# Altium PCB PCB1.PcbDoc (part 1 of 2)
Units mm, origin at the board's own origin, x right, y up, seen from the top; angles counter-clockwise.
Board outline 71.37 x 73.91 mm, 2 copper layers (Top Layer, Bottom Layer); 19 components, 50 nets, 188 pads, 78 vias.
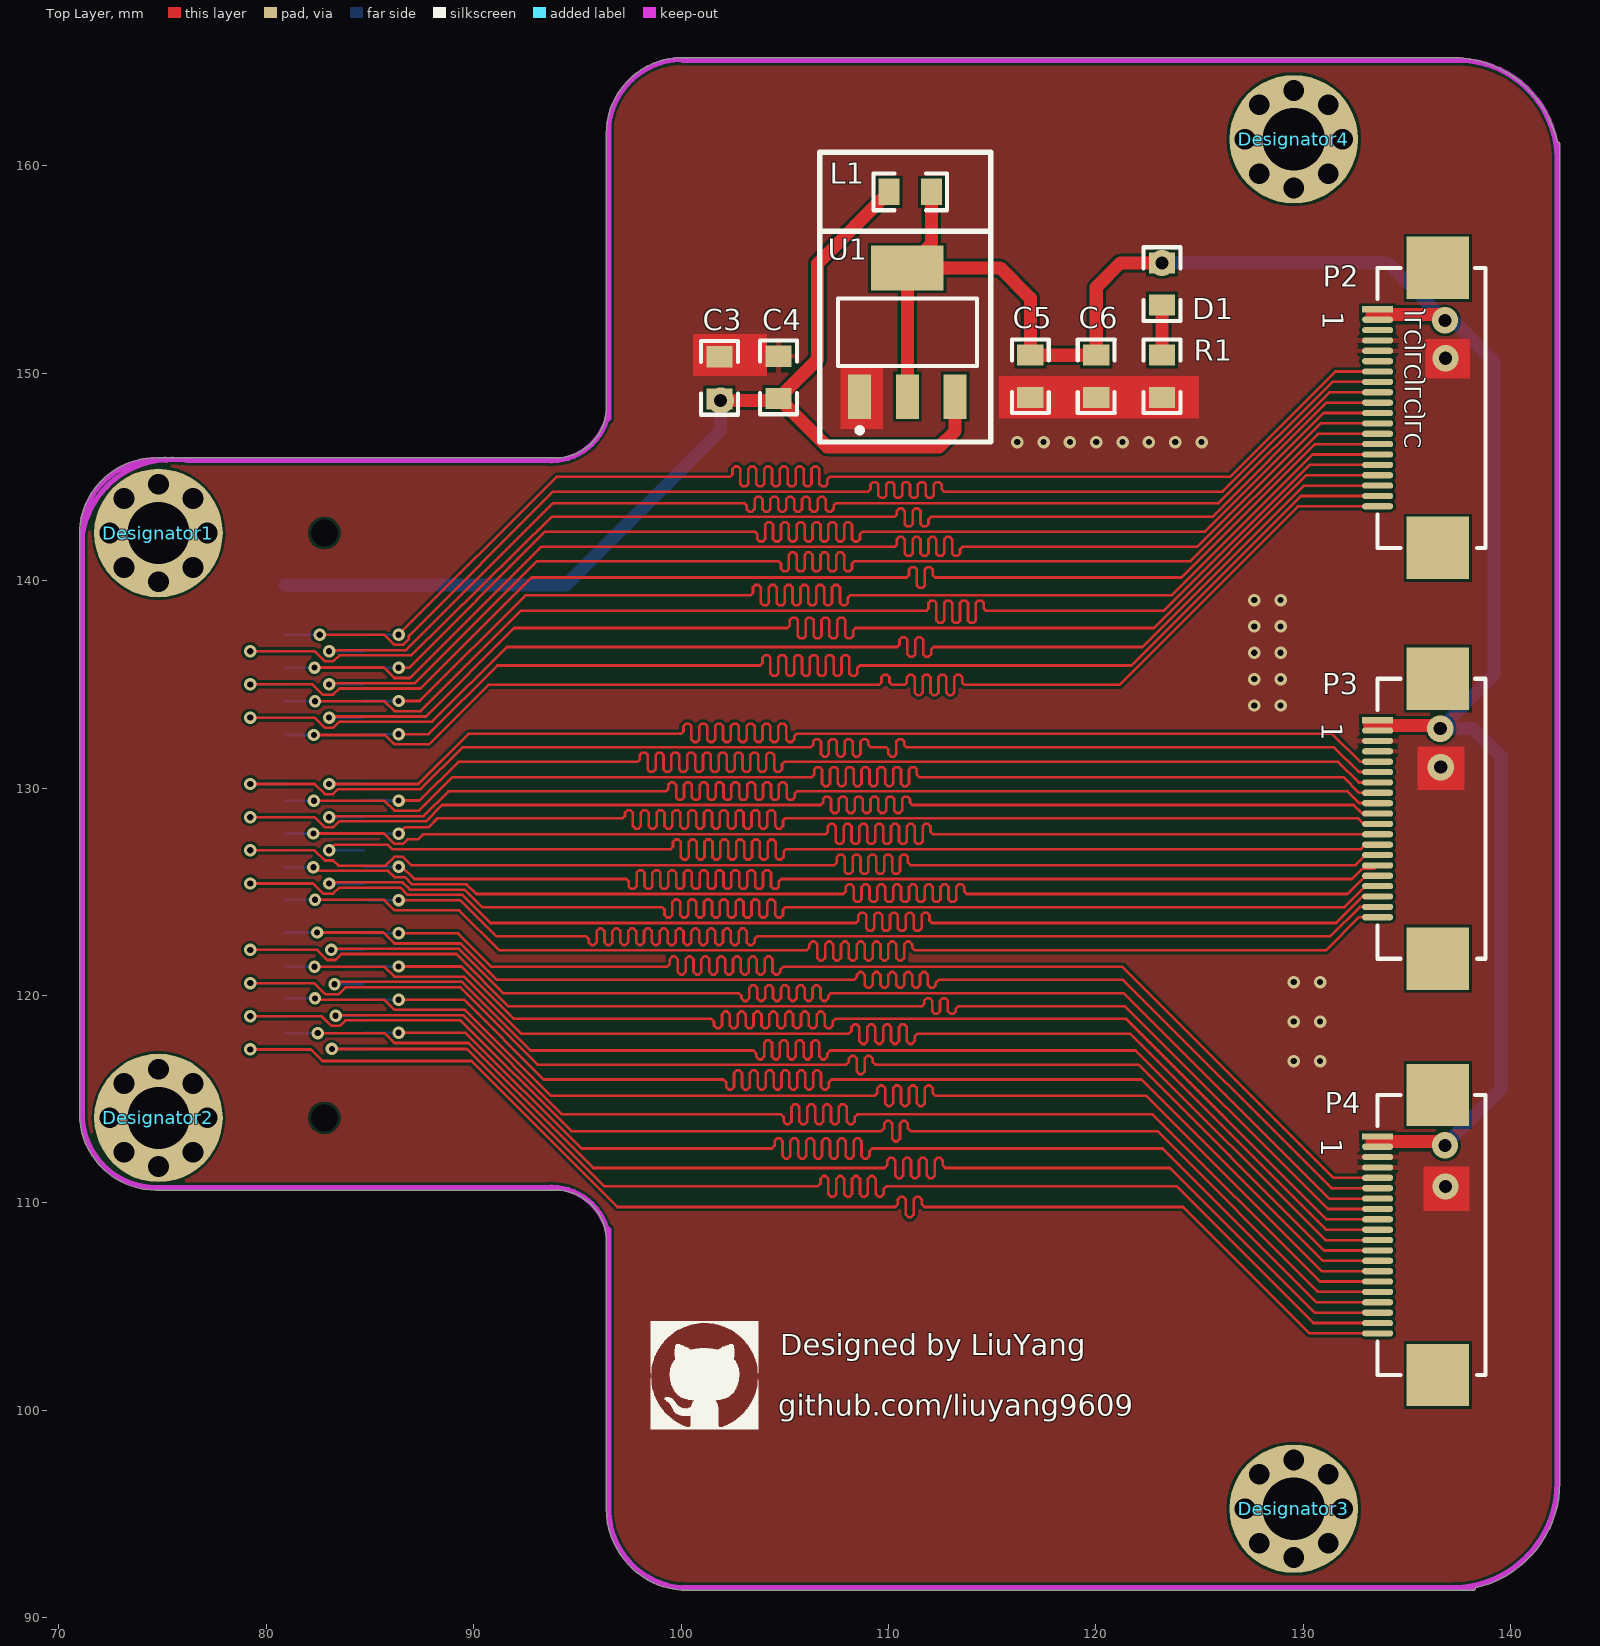
[diagram p0: Top Layer view]
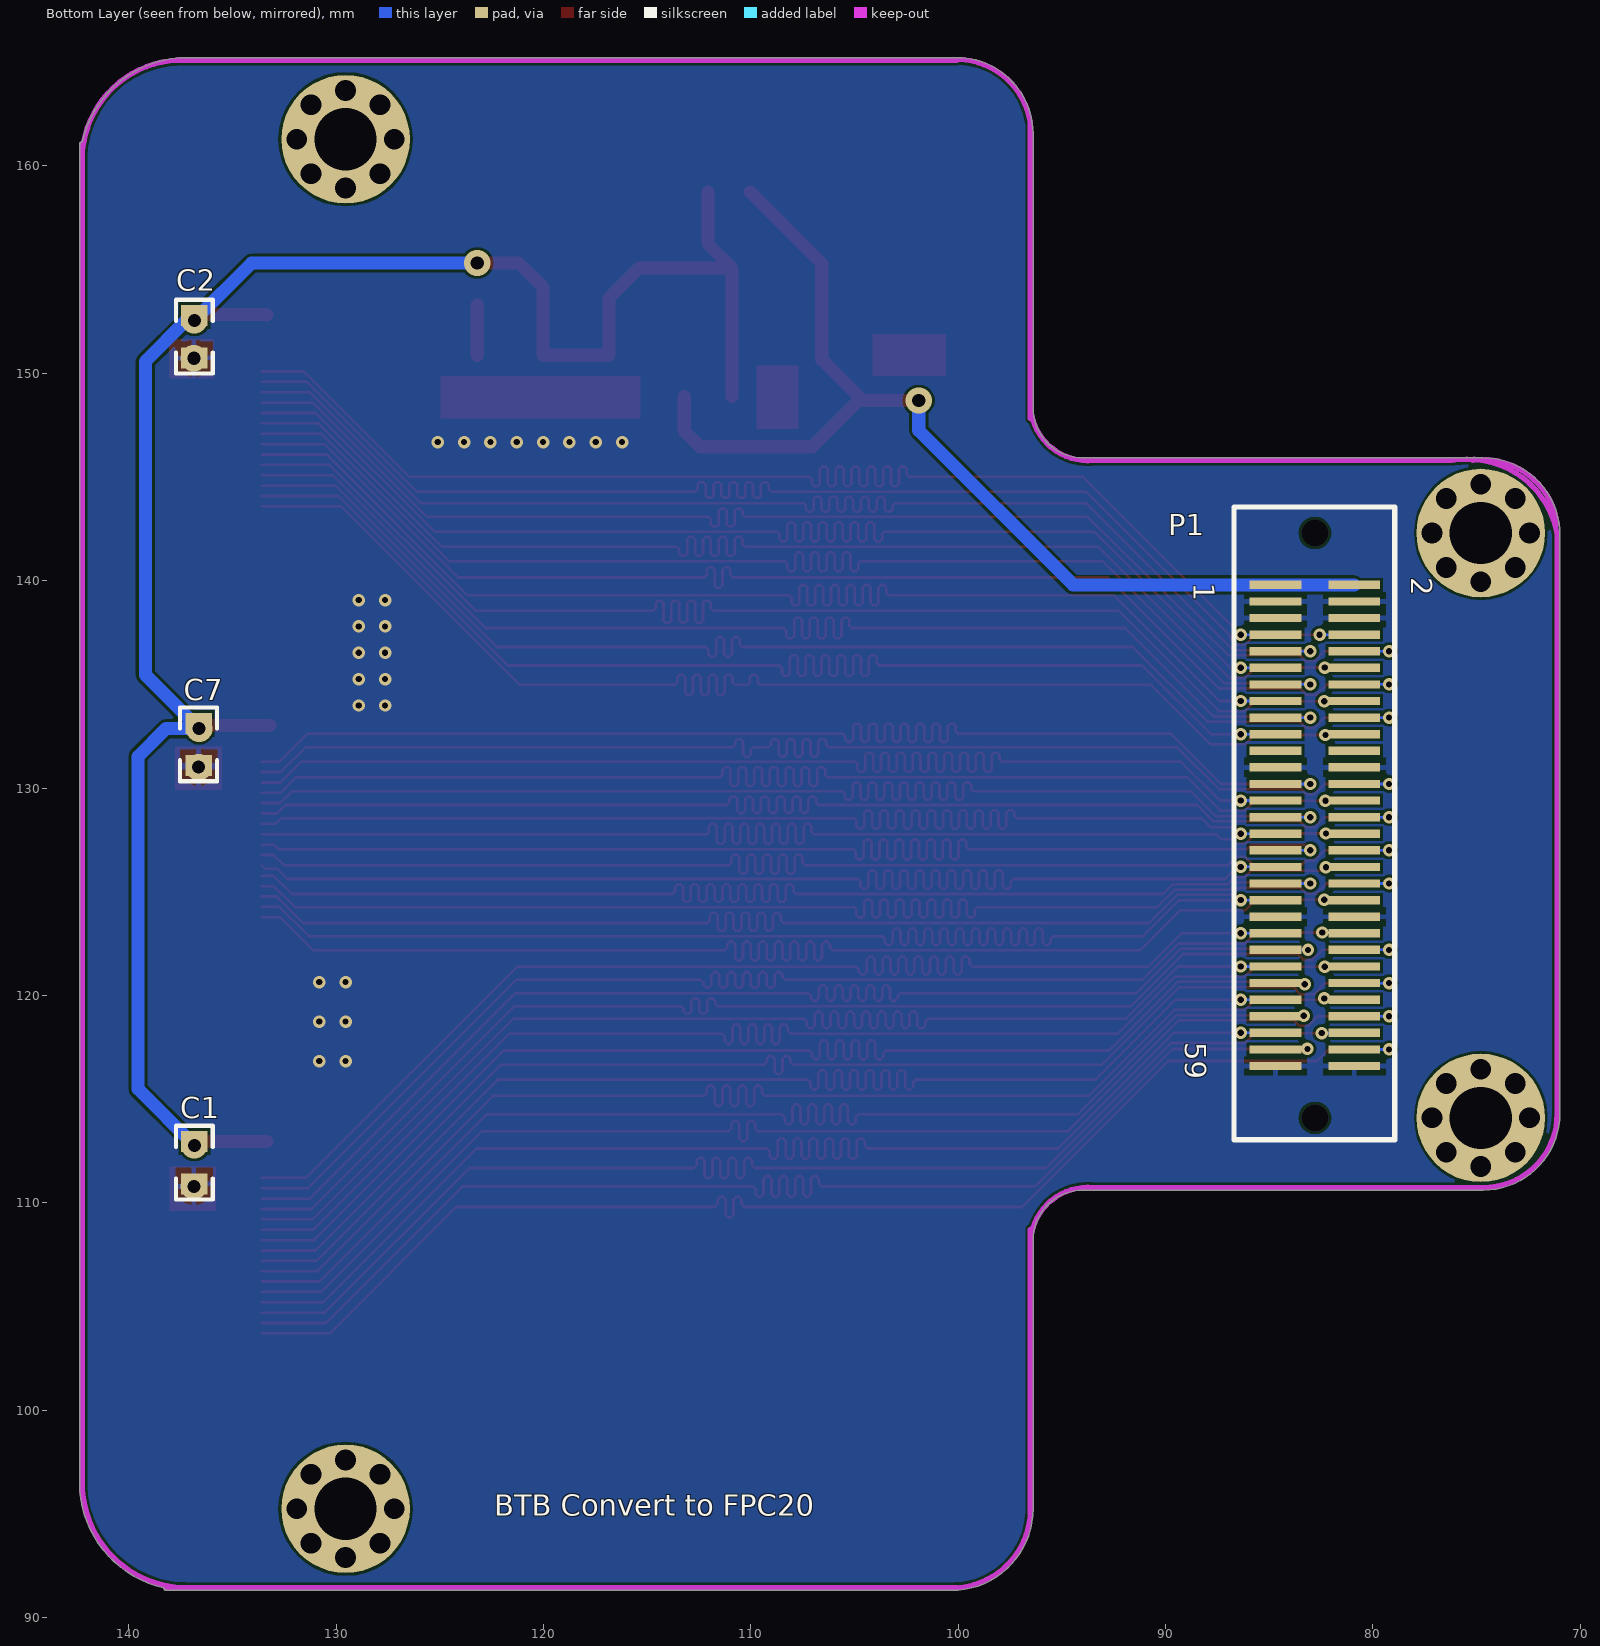
[diagram p1: Bottom Layer view, seen from below]
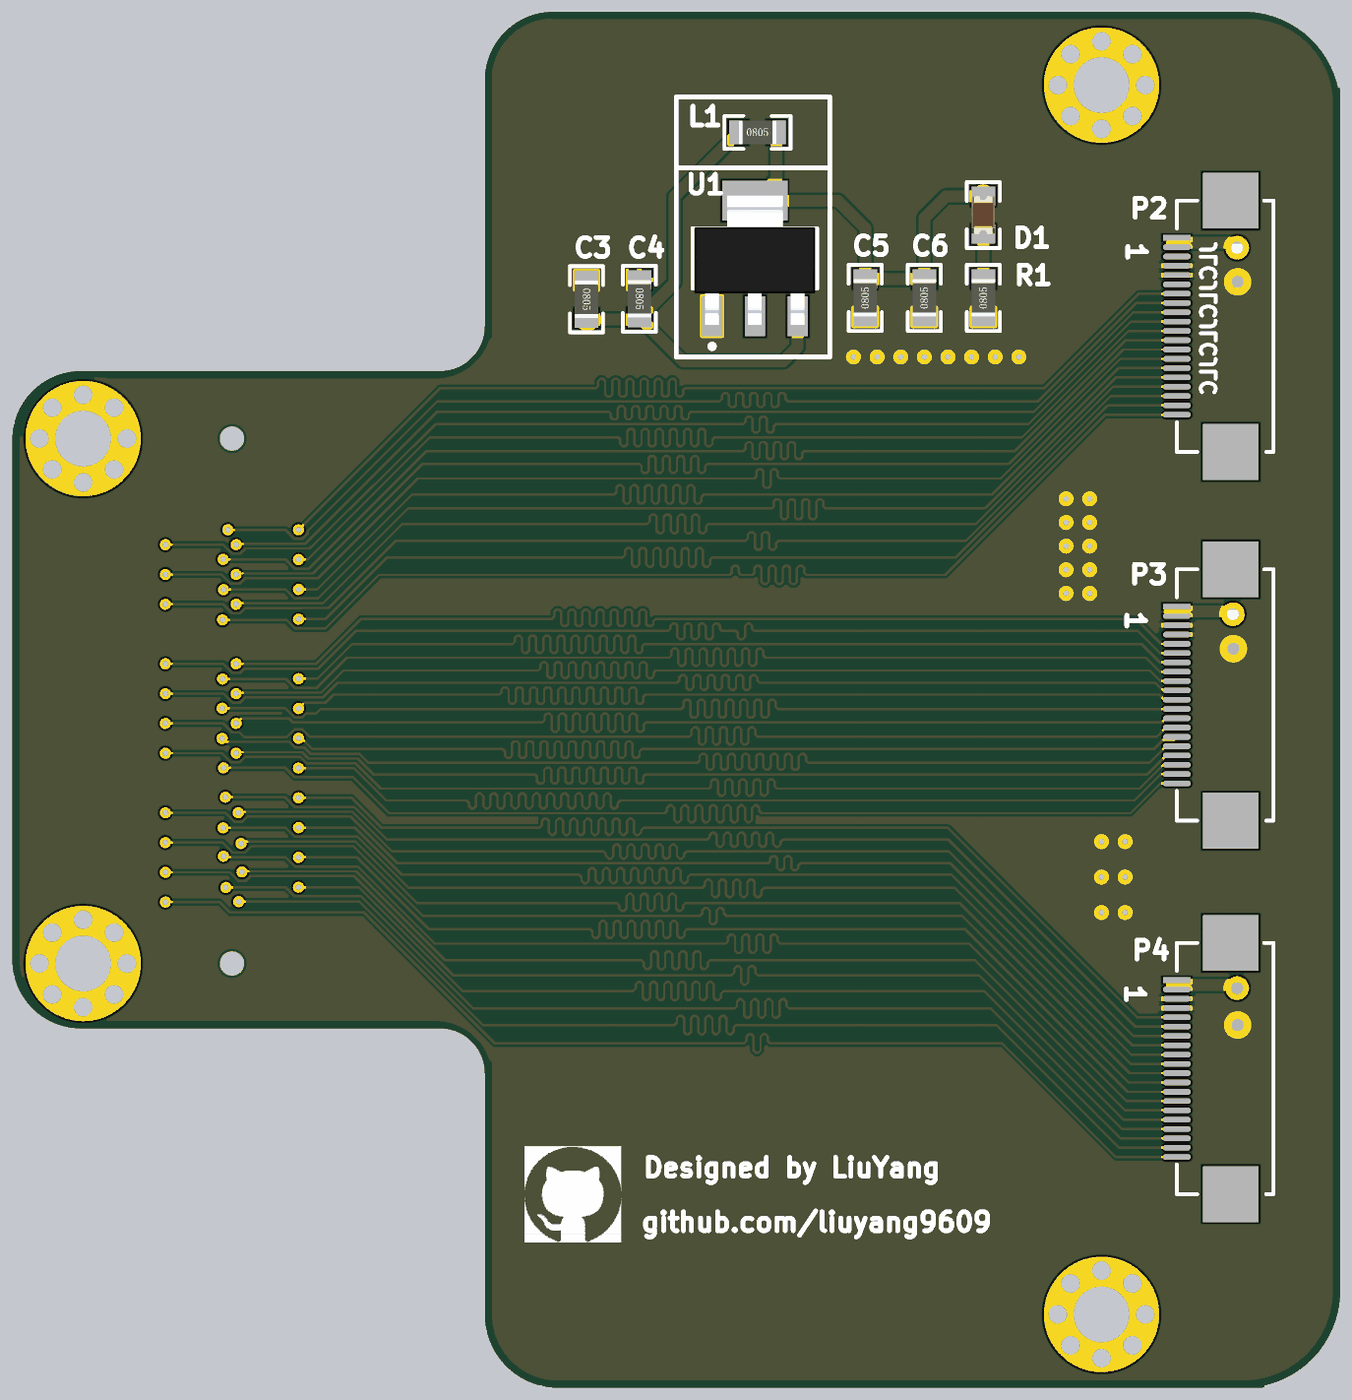
[diagram p3: 3D render of the assembled board from above, using the file's embedded part models]
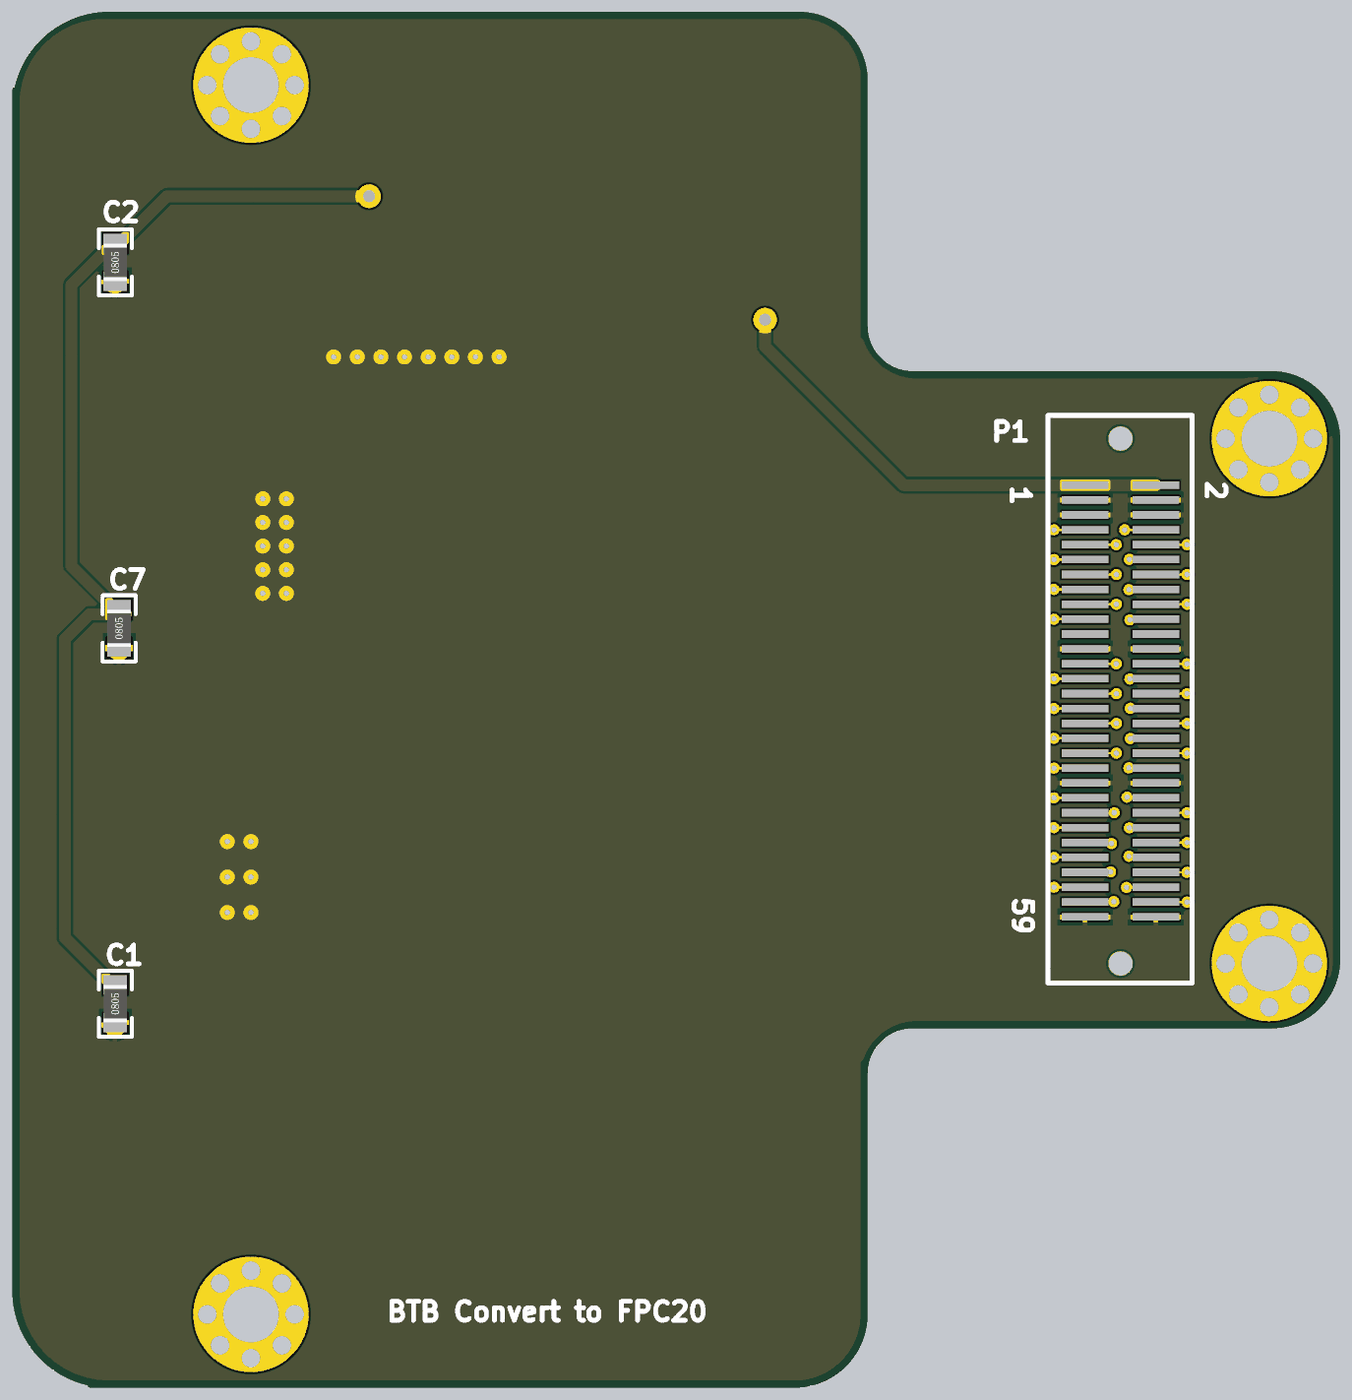
[diagram p4: 3D render of the assembled board from below, using the file's embedded part models]

## Layer stack, top to bottom
Top Solder: solder mask 0.0102, Solder Resist, Dk 3.5
Top Layer: signal copper 0.0356
Dielectric 1: dielectric 0.32, FR-4, Dk 4.8
Bottom Layer: signal copper 0.0356
Bottom Solder: solder mask 0.0102, Solder Resist, Dk 3.5

## Board outline
70.993,114.3 cw(c71.12,114.3) 70.993,114.301 70.993,114.3 ccw(c74.676,114.3) 74.676,110.617 93.98,110.617 cw(c93.98,108.204) 96.393,108.204 96.393,95.25 ccw(c100.33,95.25) 100.33,91.313 138.176,91.313 ccw(c138.176,91.44) 138.303,91.44 ccw(c137.16,96.52) 142.367,96.52 142.367,161.036 ccw(c142.24,161.036) 142.24,161.163 ccw(c137.16,160.02) 137.161,165.227 ccw(c137.16,165.1) 137.16,165.227 100.076,165.227 ccw(c100.076,161.544) 96.393,161.544 ccw(c96.52,161.544) 96.393,161.543 96.393,148.336 cw(c93.98,148.336) 93.98,145.923 74.676,145.923 ccw(c74.676,142.24) 70.993,142.24 ccw(c71.12,142.24) 70.993,142.239

## Design rules (kind name [scope] priority, off if disabled: settings)
Clearance [All] p1: gap=0.127
Length FPC3Length [InNetClass('FPC3')] p1: maxlimit=65 minlimit=64
Length FPC2 [InNetClass('FPC2')] p2: maxlimit=65 minlimit=64
Length FPC1_Length [InNetClass('FPC1')] p3: maxlimit=65 minlimit=64
PolygonConnect [All] p1: connectstyle=Relief reliefconductorwidth=0.254 reliefentries=4 polygonreliefangle="90 Angle" airgapwidth=0.254
RoutingVias [All] p1: holewidth=0.3 width=0.6 viastyle="Through Hole" minholewidth=0.3 minwidth=0.6 maxholewidth=100 maxwidth=100
SolderMaskExpansion [All] p1: expansion=0.102
Width [All] p1: maxlimit=1.27 minlimit=0.127 preferedwidth=0.127
30 further rules are at their usual default settings.

## Classes and differential pairs
net class FPC3: P14 R14 T10 T11 T12 T14 T15 U12 U14 U15 V12 W13 W14 Y14 Y16 Y17
net class FPC2: N18 P15 P16 P19 R16 R17 T16 U17 U18 U19 V15 V16 V17 V18 W15 W16
net class FPC1: N17 N20 P18 P20 R18 T17 T20 U20 V20 W18 W19 W20 Y18 Y19
component class Sheet1: C1 C2 C3 C4 C5 C6 C7 D1 L1 P1 P2 P3 P4 R1 U1

## Components (designator, comment, footprint, x,y, rotation, side; value= is the part's Value field where it differs from the comment)
C1 "Cap" R0805 136.83,111.938 r90 bottom
C2 "Cap" R0805 136.83,151.765 r90 bottom
C3 "Cap" R0805 101.854,149.784 r270 top
C4 "Cap" R0805 104.699,149.809 r270 top
C5 "Cap" R0805 116.84,149.86 r90 top
C6 "Cap" R0805 120.015,149.86 r90 top
C7 "Cap" R0805 136.627,132.105 r90 bottom
D1 "LED" LED0805红 123.19,154.305 r270 top
Designator1 "Comment" 定位孔 74.8,142.3 r0 top
Designator2 "Comment" 定位孔 74.8,114.1 r0 top
Designator3 "Comment" 定位孔 129.54,95.25 r0 top
Designator4 "Comment" 定位孔 129.54,161.29 r0 top
L1 "Inductor" R0805 111.049,158.75 r0 top
P1 "BTB 30X2" BTBCON_0.8mm_60P 84.7,139.8 r180 bottom
P2 "FPC20P" FPC20Pin 133.586,153.086 r0 top
P3 "FPC20P" FPC20Pin 133.586,133.274 r0 top
P4 "FPC20P" FPC20Pin 133.586,113.208 r0 top
R1 "Res1" R0805 123.19,149.86 r90 top
U1 "AMS1117" "SOT-223   AMS1117" 110.908,151.981 r0 top

## Footprints (in the part's own frame and the unit in brackets; to place one, negate y for a bottom-side part, rotate by r counter-clockwise, add the part's x,y. Pads: shape width x height; smd on the part's side, far side on the other; paste and mask are expansions set on the pad)
BTBCON_0.8mm_60P [mm]
  rect 2.5x0.4 smd: 1(0,0) 2(3.8,0) 3(0,-0.8) 4(3.8,-0.8) 5(0,-1.6) 6(3.8,-1.6) 7(0,-2.4) 8(3.8,-2.4) 9(0,-3.2) 10(3.8,-3.2) 11(0,-4) 12(3.8,-4) 13(0,-4.8) 14(3.8,-4.8) 15(0,-5.6) 16(3.8,-5.6) 17(0,-6.4) 18(3.8,-6.4) 19(0,-7.2) 20(3.8,-7.2) 21(0,-8) 22(3.8,-8) 23(0,-8.8) 24(3.8,-8.8) 25(0,-9.6) 26(3.8,-9.6) 27(0,-10.4) 28(3.8,-10.4) 29(0,-11.2) 30(3.8,-11.2) 31(0,-12) 32(3.8,-12) 33(0,-12.8) 34(3.8,-12.8) 35(0,-13.6) 36(3.8,-13.6) 37(0,-14.4) 38(3.8,-14.4) 39(0,-15.2) 40(3.8,-15.2) 41(0,-16) 42(3.8,-16) 43(0,-16.8) 44(3.8,-16.8) 45(0,-17.6) 46(3.8,-17.6) 47(0,-18.4) 48(3.8,-18.4) 49(0,-19.2) 50(3.8,-19.2) 51(0,-20) 52(3.8,-20) 53(0,-20.8) 54(3.8,-20.8) 55(0,-21.6) 56(3.8,-21.6) 57(0,-22.4) 58(3.8,-22.4) 59(0,-23.2) 60(3.8,-23.2)
  round 1 hole 1.3: 61(1.9,2.5) 62(1.9,-25.7)
  silkscreen extent -2,-26.75 5.75,3.75
FPC20Pin [mm]
  rect 1.5x0.3 smd: 1(0,0)
  oval 1.5x0.3 smd: 2(0,-0.5) 3(0,-1) 4(0,-1.5) 5(0,-2) 6(0,-2.5) 7(0,-3) 8(0,-3.5) 9(0,-4) 10(0,-4.5) 11(0,-5) 12(0,-5.5) 13(0,-6) 14(0,-6.5) 15(0,-7) 16(0,-7.5) 17(0,-8) 18(0,-8.5) 19(0,-9) 20(0,-9.5)
  rect 3x3 smd: 21(2.9,2) 22(2.9,-11.5)
  silkscreen extent 0,-11.5 5.2,2
LED0805红 [mil]
  rect 40x50 smd: 1(-40,0) 2(40,0)
  silkscreen extent -70,-35 70,35, body extent -40,-25 40,24, height 43
R0805 [mil]
  rect 40x50 smd: 1(-40,0) 2(40,0)
  silkscreen extent -70,-35 70,35, body extent -39,-25 39,25, height 22
"SOT-223   AMS1117" [mm] "SOT-223/SC-73; 4 Leads; Body 6.7 x 7.3 mm, inc. leads (LxW max)"
  rect 1.1x2.15 smd: 1(-2.3,-3.1) 2(0,-3.1) 3(2.3,-3.1)
  rect 3.5x2.15 smd: 4(0,3.1)
  silkscreen extent -3.35,-4.85 3.35,1.63, body extent -3.25,-3.58 3.25,3.38, height 1.65
定位孔 [mm]
  round 1 hole 1: 1(-2.35,0) 1(-1.662,-1.662) 1(-1.662,1.662) 1(0,-2.35) 1(0,2.35) 1(1.662,-1.662) 1(1.662,1.662) 1(2.35,0)
  round 6.2 hole 3: 1(0,0)

## Part data
C1 C2 C3 C4 C5 C6 C7: "Capacitor"
D1: library part LED0, "Typical INFRARED GaAs LED"
P1: library part "Header 30X2", "Header, 30-Pin, Dual row"
P2 P3 P4: library part "Header 22", "Header, 22-Pin"
R1: "Resistor"

## Via types
v1: diameter 0.6, hole 0.3, Top Layer to Bottom Layer, 70 vias
v2: diameter 1.27, hole 0.635, Top Layer to Bottom Layer, 8 vias

## Nets (pads, with @x,y where several pads share a name; then routed paths per layer and width w, separated by ;. In a path a pad name is that pad's centre, name@x,y a point inside that pad or via, vN(x,y) a via of type N, cw(c..) or ccw(c..) an arc to the next point about the centre after c; other vN are vias at no path point)
DGND: C1.1 C2.1 C3.1 C4.1 C5.1 C6.1 C7.1 P1.3 P1.4 P1.5 P1.6 P1.23 P1.24 P1.41 P1.42 P1.59 P1.60 P2.4 P2.5 P3.3 P3.4 P4.3 P4.4 R1.1 U1.1
  other v1: 129.54,116.84 130.81,116.84 129.54,118.745 130.81,118.745 129.54,120.65 130.81,120.65 127.635,133.985 128.905,133.985 127.635,135.255 128.905,135.255 127.635,136.525 128.905,136.525 127.635,137.795 128.905,137.795 127.635,139.065 128.905,139.065 116.205,146.685 117.475,146.685 118.745,146.685 120.015,146.685 121.285,146.685 122.555,146.685 123.825,146.685 125.095,146.685
  other v2: 136.855,110.795 136.627,131.013 136.855,150.724
N17: P1.15 P2.15 | length 63.9
  Top Layer w0.127: v1(86.377,134.2) 87.391,134.2 92.485,139.294 100.889,139.294 103.353,139.294 103.467,139.408 103.467,139.679 103.581,139.794 103.734,139.794 103.848,139.679 103.848,139.294 103.848,138.925 103.962,138.811 104.115,138.811 104.229,138.925 104.229,139.294 104.229,139.679 104.343,139.794 104.496,139.794 104.61,139.679 104.61,139.294 104.61,138.925 104.724,138.811 104.877,138.811 104.991,138.925 104.991,139.294 104.991,139.679 105.105,139.794 105.258,139.794 105.372,139.679 105.372,139.294 105.372,138.925 105.486,138.811 105.639,138.811 105.753,138.925 105.753,139.294 105.753,139.679 105.867,139.794 106.02,139.794 106.134,139.679 106.134,139.294 106.134,138.925 106.248,138.811 106.401,138.811 106.515,138.925 106.515,139.294 106.515,139.679 106.629,139.794 106.782,139.794 106.896,139.679 106.896,139.294 106.896,138.925 107.01,138.811 107.163,138.811 107.277,138.925 107.277,139.294 107.277,139.679 107.391,139.794 107.544,139.794 107.658,139.679 107.658,139.294 107.658,138.925 107.772,138.811 107.925,138.811 108.039,138.925 108.039,139.179 108.153,139.294 108.229,139.294 123.655,139.294 130.447,146.086 P2.15@133.586,146.086
  Bottom Layer w0.127: P1.15@84.7,134.2 v1(86.377,134.2)
N18: P1.29 P3.9 | length 64.1
  Top Layer w0.127: v1(83.023,128.6) 83.074,128.651 87.586,128.651 88.78,129.845 94.818,129.845 99.263,129.845 99.377,129.959 99.377,130.162 99.492,130.277 99.644,130.277 99.758,130.162 99.758,129.845 99.758,129.553 99.873,129.438 100.025,129.438 100.139,129.553 100.139,129.845 100.139,130.162 100.254,130.277 100.406,130.277 100.52,130.162 100.52,129.845 100.52,129.553 100.635,129.438 100.787,129.438 100.901,129.553 100.901,129.845 100.901,130.162 101.016,130.277 101.168,130.277 101.282,130.162 101.282,129.845 101.282,129.553 101.397,129.438 101.549,129.438 101.663,129.553 101.663,129.845 101.663,130.162 101.778,130.277 101.93,130.277 102.044,130.162 102.044,129.845 102.044,129.553 102.159,129.438 102.311,129.438 102.425,129.553 102.425,129.845 102.425,130.162 102.54,130.277 102.692,130.277 102.806,130.162 102.806,129.845 102.806,129.553 102.921,129.438 103.073,129.438 103.188,129.553 103.188,129.845 103.188,130.162 103.302,130.277 103.454,130.277 103.569,130.162 103.569,129.845 103.569,129.553 103.683,129.438 103.835,129.438 103.95,129.553 103.95,129.845 103.95,130.162 104.064,130.277 104.216,130.277 104.331,130.162 104.331,129.845 104.331,129.553 104.445,129.438 104.597,129.438 104.712,129.553 104.712,129.845 104.712,130.162 104.826,130.277 104.978,130.277 105.093,130.162 105.093,129.845 105.093,129.553 105.207,129.438 105.359,129.438 105.474,129.553 105.474,129.731 105.588,129.845 105.664,129.845 132.131,129.845 132.693,129.282 133.577,129.282 P3.9@133.586,129.274
  Bottom Layer w0.127: v1(83.023,128.6) P1.29@84.7,128.6
N20: P1.7 P2.7 | length 63.9
  Top Layer w0.127: v1(86.377,137.4) 93.986,145.009 99.187,145.009 102.362,145.009 102.476,145.123 102.476,145.394 102.591,145.509 102.743,145.509 102.857,145.394 102.857,145.009 102.857,144.666 102.972,144.551 103.124,144.551 103.238,144.666 103.238,145.009 103.238,145.394 103.353,145.509 103.505,145.509 103.619,145.394 103.619,145.009 103.619,144.666 103.734,144.551 103.886,144.551 104,144.666 104,145.009 104,145.394 104.115,145.509 104.267,145.509 104.381,145.394 104.381,145.009 104.381,144.666 104.496,144.551 104.648,144.551 104.762,144.666 104.762,145.009 104.762,145.394 104.877,145.509 105.029,145.509 105.143,145.394 105.143,145.009 105.143,144.666 105.258,144.551 105.41,144.551 105.524,144.666 105.524,145.009 105.524,145.394 105.639,145.509 105.791,145.509 105.905,145.394 105.905,145.009 105.905,144.666 106.02,144.551 106.172,144.551 106.286,144.666 106.286,145.009 106.286,145.394 106.401,145.509 106.553,145.509 106.667,145.394 106.667,145.009 106.667,144.666 106.782,144.551 106.934,144.551 107.048,144.666 107.048,144.894 107.163,145.009 107.239,145.009 126.467,145.009 131.544,150.086 P2.7@133.586,150.086
  Bottom Layer w0.127: P1.7@84.7,137.4 v1(86.377,137.4)
NetD1_2: D1.2 R1.2 | length 2.4
  Top Layer w0.635: R1.2@123.19,150.876 D1.2@123.19,153.289
P14: P1.45 P4.7 | length 63.6
  Top Layer w0.127: v1(83.134,122.2) 83.079,122.255 83.134,122.255 89.269,122.255 91.407,120.117 98.171,120.117 102.775,120.117 102.908,119.983 102.908,119.869 103.041,119.736 103.156,119.736 103.289,119.869 103.289,120.117 103.289,120.364 103.422,120.498 103.537,120.498 103.67,120.364 103.67,120.117 103.67,119.869 103.803,119.736 103.918,119.736 104.051,119.869 104.051,120.117 104.051,120.364 104.184,120.498 104.299,120.498 104.432,120.364 104.432,120.117 104.432,119.869 104.565,119.736 104.68,119.736 104.813,119.869 104.813,120.117 104.813,120.364 104.946,120.498 105.061,120.498 105.194,120.364 105.194,120.117 105.194,119.869 105.327,119.736 105.442,119.736 105.575,119.869 105.575,120.117 105.575,120.364 105.708,120.498 105.823,120.498 105.956,120.364 105.956,120.117 105.956,119.869 106.089,119.736 106.204,119.736 106.337,119.869 106.337,120.117 106.337,120.364 106.47,120.498 106.585,120.498 106.718,120.364 106.718,120.117 106.718,119.869 106.851,119.736 106.966,119.736 107.099,119.869 107.099,119.983 107.232,120.117 107.29,120.117 121.336,120.117 131.244,110.208 P4.7@133.586,110.208
  Bottom Layer w0.127: v1(83.134,122.2) P1.45@84.7,122.2
P15: P1.31 P3.11 | length 64.1
  Top Layer w0.127: v1(86.377,127.8) 86.695,128.118 87.833,128.118 88.265,128.549 94.361,128.549 97.18,128.549 97.295,128.664 97.295,128.816 97.409,128.93 97.561,128.93 97.676,128.816 97.676,128.549 97.676,128.164 97.79,128.049 97.942,128.049 98.057,128.164 98.057,128.549 98.057,128.816 98.171,128.93 98.323,128.93 98.438,128.816 98.438,128.549 98.438,128.164 98.552,128.049 98.704,128.049 98.819,128.164 98.819,128.549 98.819,128.816 98.933,128.93 99.085,128.93 99.2,128.816 99.2,128.549 99.2,128.164 99.314,128.049 99.466,128.049 99.581,128.164 99.581,128.549 99.581,128.816 99.695,128.93 99.847,128.93 99.962,128.816 99.962,128.549 99.962,128.164 100.076,128.049 100.228,128.049 100.343,128.164 100.343,128.549 100.343,128.816 100.457,128.93 100.609,128.93 100.724,128.816 100.724,128.549 100.724,128.164 100.838,128.049 100.99,128.049 101.105,128.164 101.105,128.549 101.105,128.816 101.219,128.93 101.371,128.93 101.486,128.816 101.486,128.549 101.486,128.164 101.6,128.049 101.752,128.049 101.867,128.164 101.867,128.549 101.867,128.816 101.981,128.93 102.133,128.93 102.248,128.816 102.248,128.549 102.248,128.164 102.362,128.049 102.514,128.049 102.629,128.164 102.629,128.549 102.629,128.816 102.743,128.93 102.895,128.93 103.01,128.816 103.01,128.549 103.01,128.164 103.124,128.049 103.276,128.049 103.391,128.164 103.391,128.549 103.391,128.816 103.505,128.93 103.657,128.93 103.772,128.816 103.772,128.549 103.772,128.164 103.886,128.049 104.038,128.049 104.153,128.164 104.153,128.549 104.153,128.816 104.267,128.93 104.419,128.93 104.534,128.816 104.534,128.549 104.534,128.164 104.648,128.049 104.8,128.049 104.915,128.164 104.915,128.435 105.029,128.549 105.105,128.549 132.639,128.549 132.914,128.274 P3.11@133.586,128.274
  Bottom Layer w0.127: P1.31@84.7,127.8 v1(86.377,127.8)
P16: P1.32 P3.12 | length 63.8
  Top Layer w0.127: v1(82.271,127.813) 85.671,127.813 86.174,127.309 86.58,127.309 86.799,127.528 87.311,127.528 87.557,127.774 106.883,127.774 106.959,127.774 107.074,127.889 107.074,128.16 107.188,128.274 107.34,128.274 107.455,128.16 107.455,127.774 107.455,127.424 107.569,127.309 107.721,127.309 107.836,127.424 107.836,127.774 107.836,128.16 107.95,128.274 108.102,128.274 108.217,128.16 108.217,127.774 108.217,127.424 108.331,127.309 108.483,127.309 108.598,127.424 108.598,127.774 108.598,128.16 108.712,128.274 108.864,128.274 108.979,128.16 108.979,127.774 108.979,127.424 109.093,127.309 109.245,127.309 109.36,127.424 109.36,127.774 109.36,128.16 109.474,128.274 109.626,128.274 109.741,128.16 109.741,127.774 109.741,127.424 109.855,127.309 110.007,127.309 110.122,127.424 110.122,127.774 110.122,128.16 110.236,128.274 110.388,128.274 110.503,128.16 110.503,127.774 110.503,127.424 110.617,127.309 110.769,127.309 110.884,127.424 110.884,127.774 110.884,128.16 110.998,128.274 111.15,128.274 111.265,128.16 111.265,127.774 111.265,127.424 111.379,127.309 111.531,127.309 111.646,127.424 111.646,127.774 111.646,128.16 111.76,128.274 111.912,128.274 112.027,128.16 112.027,127.889 112.141,127.774 114.122,127.774 P3.12@133.586,127.774
  Bottom Layer w0.127: P1.32@80.9,127.8 80.913,127.813 v1(82.271,127.813)
P18: P1.16 P2.16 | length 64.1
  Top Layer w0.127: v1(82.347,134.188) 85.695,134.188 86.174,133.709 87.431,133.709 92.278,138.557 111.735,138.557 111.83,138.557 111.925,138.652 111.925,138.935 112.02,139.03 112.211,139.03 112.306,138.935 112.306,138.557 112.306,138.078 112.401,137.983 112.592,137.983 112.687,138.078 112.687,138.557 112.687,138.935 112.782,139.03 112.973,139.03 113.068,138.935 113.068,138.557 113.068,138.078 113.163,137.983 113.354,137.983 113.449,138.078 113.449,138.557 113.449,138.935 113.544,139.03 113.735,139.03 113.83,138.935 113.83,138.557 113.83,138.078 113.925,137.983 114.116,137.983 114.211,138.078 114.211,138.557 114.211,138.935 114.306,139.03 114.497,139.03 114.592,138.935 114.592,138.652 114.687,138.557 115.037,138.557 123.277,138.557 130.306,145.586 P2.16@133.586,145.586
  Bottom Layer w0.127: P1.16@80.9,134.2 80.912,134.188 v1(82.347,134.188)
P19: P1.30 P3.10 | length 63.9
  Top Layer w0.127: v1(79.223,128.6) 82.329,128.6 82.82,128.109 83.226,128.109 83.514,128.397 87.692,128.397 88.479,129.184 106.655,129.184 106.731,129.184 106.845,129.299 106.845,129.477 106.959,129.591 107.112,129.591 107.226,129.477 107.226,129.184 107.226,128.918 107.34,128.803 107.493,128.803 107.607,128.918 107.607,129.184 107.607,129.477 107.721,129.591 107.874,129.591 107.988,129.477 107.988,129.184 107.988,128.918 108.102,128.803 108.255,128.803 108.369,128.918 108.369,129.184 108.369,129.477 108.483,129.591 108.636,129.591 108.75,129.477 108.75,129.184 108.75,128.918 108.864,128.803 109.017,128.803 109.131,128.918 109.131,129.184 109.131,129.477 109.245,129.591 109.398,129.591 109.512,129.477 109.512,129.184 109.512,128.918 109.626,128.803 109.779,128.803 109.893,128.918 109.893,129.184 109.893,129.477 110.007,129.591 110.16,129.591 110.274,129.477 110.274,129.184 110.274,128.918 110.388,128.803 110.541,128.803 110.655,128.918 110.655,129.184 110.655,129.477 110.769,129.591 110.922,129.591 111.036,129.477 111.036,129.299 111.15,129.184 114.224,129.184 132.432,129.184 132.842,128.774 P3.10@133.586,128.774
  Bottom Layer w0.127: v1(79.223,128.6) P1.30@80.9,128.6
P20: P1.8 P2.8 | length 63.9
  Top Layer w0.127: v1(82.577,137.4) 85.683,137.4 86.174,136.909 86.58,136.909 86.867,137.197 86.867,137.337 93.828,144.297 108.941,144.297 109.017,144.297 109.131,144.412 109.131,144.64 109.245,144.755 109.398,144.755 109.512,144.64 109.512,144.297 109.512,144.107 109.626,143.993 109.779,143.993 109.893,144.107 109.893,144.297 109.893,144.64 110.007,144.755 110.16,144.755 110.274,144.64 110.274,144.297 110.274,144.107 110.388,143.993 110.541,143.993 110.655,144.107 110.655,144.297 110.655,144.64 110.769,144.755 110.922,144.755 111.036,144.64 111.036,144.297 111.036,144.107 111.15,143.993 111.303,143.993 111.417,144.107 111.417,144.297 111.417,144.64 111.531,144.755 111.684,144.755 111.798,144.64 111.798,144.297 111.798,144.107 111.912,143.993 112.065,143.993 112.179,144.107 112.179,144.297 112.179,144.64 112.293,144.755 112.446,144.755 112.56,144.64 112.56,144.412 112.674,144.297 118.212,144.297 126.115,144.297 131.403,149.586 P2.8@133.586,149.586
  Bottom Layer w0.127: P1.8@80.9,137.4 v1(82.577,137.4)
R14: P1.46 P4.8 | length 63.7
  Top Layer w0.127: v1(79.223,122.2) 82.44,122.2 82.931,121.709 83.337,121.709 83.63,122.001 89.163,122.001 91.683,119.482 111.531,119.482 111.608,119.482 111.722,119.596 111.722,119.748 111.836,119.863 111.989,119.863 112.103,119.748 112.103,119.482 112.103,119.24 112.217,119.126 112.37,119.126 112.484,119.24 112.484,119.482 112.484,119.748 112.598,119.863 112.751,119.863 112.865,119.748 112.865,119.482 112.865,119.24 112.979,119.126 113.132,119.126 113.246,119.24 113.246,119.367 113.36,119.482 115.976,119.482 121.412,119.482 131.185,109.708 P4.8@133.586,109.708
  Bottom Layer w0.127: v1(79.223,122.2) P1.46@80.9,122.2
R16: P1.27 P3.7 | length 64.1
  Top Layer w0.127: v1(86.377,129.4) 87.388,129.4 89.256,131.267 95.352,131.267 97.892,131.267 98.006,131.381 98.006,131.597 98.12,131.711 98.273,131.711 98.387,131.597 98.387,131.267 98.387,130.902 98.501,130.788 98.654,130.788 98.768,130.902 98.768,131.267 98.768,131.597 98.882,131.711 99.035,131.711 99.149,131.597 99.149,131.267 99.149,130.902 99.263,130.788 99.416,130.788 99.53,130.902 99.53,131.267 99.53,131.597 99.644,131.711 99.797,131.711 99.911,131.597 99.911,131.267 99.911,130.902 100.025,130.788 100.178,130.788 100.292,130.902 100.292,131.267 100.292,131.597 100.406,131.711 100.559,131.711 100.673,131.597 100.673,131.267 100.673,130.902 100.787,130.788 100.94,130.788 101.054,130.902 101.054,131.267 101.054,131.597 101.168,131.711 101.321,131.711 101.435,131.597 101.435,131.267 101.435,130.902 101.549,130.788 101.702,130.788 101.816,130.902 101.816,131.267 101.816,131.597 101.93,131.711 102.083,131.711 102.197,131.597 102.197,131.267 102.197,130.902 102.311,130.788 102.464,130.788 102.578,130.902 102.578,131.267 102.578,131.597 102.692,131.711 102.845,131.711 102.959,131.597 102.959,131.267 102.959,130.902 103.073,130.788 103.226,130.788 103.34,130.902 103.34,131.267 103.34,131.597 103.454,131.711 103.607,131.711 103.721,131.597 103.721,131.267 103.721,130.902 103.835,130.788 103.988,130.788 104.102,130.902 104.102,131.267 104.102,131.597 104.216,131.711 104.369,131.711 104.483,131.597 104.483,131.267 104.483,130.902 104.597,130.788 104.75,130.788 104.864,130.902 104.864,131.153 104.978,131.267 105.054,131.267 131.682,131.267 132.675,130.274 P3.7@133.586,130.274
  Bottom Layer w0.127: P1.27@84.7,129.4 v1(86.377,129.4)
R17: P1.28 P3.8 | length 63.9
  Top Layer w0.127: v1(82.296,129.388) 85.696,129.388 86.174,128.909 87.355,128.909 88.976,130.531 106.223,130.531 106.299,130.531 106.413,130.645 106.413,130.899 106.528,131.013 106.68,131.013 106.794,130.899 106.794,130.531 106.794,130.213 106.909,130.099 107.061,130.099 107.175,130.213 107.175,130.531 107.175,130.899 107.29,131.013 107.442,131.013 107.556,130.899 107.556,130.531 107.556,130.213 107.671,130.099 107.823,130.099 107.937,130.213 107.937,130.531 107.937,130.899 108.052,131.013 108.204,131.013 108.318,130.899 108.318,130.531 108.318,130.213 108.433,130.099 108.585,130.099 108.699,130.213 108.699,130.531 108.699,130.899 108.814,131.013 108.966,131.013 109.08,130.899 109.08,130.531 109.08,130.213 109.195,130.099 109.347,130.099 109.461,130.213 109.461,130.531 109.461,130.899 109.576,131.013 109.728,131.013 109.842,130.899 109.842,130.531 109.842,130.213 109.957,130.099 110.109,130.099 110.223,130.213 110.223,130.531 110.223,130.899 110.338,131.013 110.49,131.013 110.604,130.899 110.604,130.531 110.604,130.213 110.719,130.099 110.871,130.099 110.985,130.213 110.985,130.531 110.985,130.899 111.1,131.013 111.252,131.013 111.366,130.899 111.366,130.645 111.481,130.531 113.563,130.531 131.928,130.531 132.684,129.774 P3.8@133.586,129.774
  Bottom Layer w0.127: P1.28@80.9,129.4 80.912,129.388 v1(82.296,129.388)
R18: P1.12 P2.12 | length 64
  Top Layer w0.127: v1(82.321,135.814) 85.67,135.814 86.174,135.309 86.922,135.309 93.243,141.63 110.211,141.63 110.287,141.63 110.401,141.745 110.401,141.999 110.515,142.113 110.668,142.113 110.782,141.999 110.782,141.63 110.782,141.313 110.896,141.199 111.049,141.199 111.163,141.313 111.163,141.63 111.163,141.999 111.277,142.113 111.43,142.113 111.544,141.999 111.544,141.63 111.544,141.313 111.658,141.199 111.811,141.199 111.925,141.313 111.925,141.63 111.925,141.999 112.039,142.113 112.192,142.113 112.306,141.999 112.306,141.63 112.306,141.313 112.42,141.199 112.573,141.199 112.687,141.313 112.687,141.63 112.687,141.999 112.801,142.113 112.954,142.113 113.068,141.999 113.068,141.63 113.068,141.313 113.182,141.199 113.335,141.199 113.449,141.313 113.449,141.516 113.563,141.63 119.609,141.63 124.884,141.63 130.84,147.586 P2.12@133.586,147.586
  Bottom Layer w0.127: P1.12@80.9,135.8 v1@82.245,135.8
T10: P1.58 P4.20 | length 64.1
  Top Layer w0.127: v1(79.223,117.4) 82.142,117.4 82.702,116.84 89.891,116.84 96.926,109.804 110.261,109.804 110.319,109.804 110.452,109.938 110.452,110.171 110.585,110.304 110.7,110.304 110.833,110.171 110.833,109.804 110.833,109.438 110.966,109.304 111.081,109.304 111.214,109.438 111.214,109.804 111.214,110.171 111.347,110.304 111.462,110.304 111.595,110.171 111.595,109.938 111.728,109.804 119.71,109.804 124.206,109.804 130.302,103.708 P4.20@133.586,103.708
  Bottom Layer w0.127: v1(79.223,117.4) P1.58@80.9,117.4
T11: P1.57 P4.19 | length 64
  Top Layer w0.127: v1(83.16,117.424) 89.666,117.424 96.295,110.795 102.006,110.795 106.585,110.795 106.718,110.928 106.718,111.161 106.851,111.295 106.966,111.295 107.099,111.161 107.099,110.795 107.099,110.428 107.232,110.295 107.347,110.295 107.48,110.428 107.48,110.795 107.48,111.161 107.613,111.295 107.728,111.295 107.861,111.161 107.861,110.795 107.861,110.428 107.994,110.295 108.109,110.295 108.242,110.428 108.242,110.795 108.242,111.161 108.375,111.295 108.49,111.295 108.623,111.161 108.623,110.795 108.623,110.428 108.756,110.295 108.871,110.295 109.004,110.428 109.004,110.795 109.004,111.161 109.137,111.295 109.252,111.295 109.385,111.161 109.385,110.795 109.385,110.428 109.518,110.295 109.633,110.295 109.766,110.428 109.766,110.661 109.899,110.795 109.957,110.795 123.901,110.795 130.488,104.208 P4.19@133.586,104.208
  Bottom Layer w0.127: v1(83.16,117.424) 84.676,117.424 P1.57@84.7,117.4
T12: P1.55 P4.17 | length 64.1
  Top Layer w0.127: v1(86.377,118.2) 89.608,118.2 95.185,112.624 101.219,112.624 104.375,112.624 104.508,112.757 104.508,112.986 104.642,113.12 104.756,113.12 104.889,112.986 104.889,112.624 104.889,112.261 105.023,112.127 105.137,112.127 105.27,112.261 105.27,112.624 105.27,112.986 105.404,113.12 105.518,113.12 105.651,112.986 105.651,112.624 105.651,112.261 105.785,112.127 105.899,112.127 106.032,112.261 106.032,112.624 106.032,112.986 106.166,113.12 106.28,113.12 106.413,112.986 106.413,112.624 106.413,112.261 106.547,112.127 106.661,112.127 106.794,112.261 106.794,112.624 106.794,112.986 106.928,113.12 107.042,113.12 107.175,112.986 107.175,112.624 107.175,112.261 107.309,112.127 107.423,112.127 107.556,112.261 107.556,112.624 107.556,112.986 107.69,113.12 107.804,113.12 107.937,112.986 107.937,112.624 107.937,112.261 108.071,112.127 108.185,112.127 108.318,112.261 108.318,112.624 108.318,112.986 108.452,113.12 108.566,113.12 108.699,112.986 108.699,112.624 108.699,112.261 108.833,112.127 108.947,112.127 109.08,112.261 109.08,112.49 109.214,112.624 109.271,112.624 123.215,112.624 130.631,105.208 P4.17@133.586,105.208
  Bottom Layer w0.127: P1.55@84.7,118.2 v1(86.377,118.2)
T14: P1.51 P4.13 | length 64.1
  Top Layer w0.127: v1(86.377,119.8) 89.521,119.8 93.37,115.951 99.187,115.951 102.038,115.951 102.171,115.818 102.171,115.594 102.305,115.461 102.419,115.461 102.552,115.594 102.552,115.951 102.552,116.265 102.686,116.398 102.8,116.398 102.933,116.265 102.933,115.951 102.933,115.594 103.067,115.461 103.181,115.461 103.314,115.594 103.314,115.951 103.314,116.265 103.448,116.398 103.562,116.398 103.695,116.265 103.695,115.951 103.695,115.594 103.829,115.461 103.943,115.461 104.076,115.594 104.076,115.951 104.076,116.265 104.21,116.398 104.324,116.398 104.457,116.265 104.457,115.951 104.457,115.594 104.591,115.461 104.705,115.461 104.838,115.594 104.838,115.951 104.838,116.265 104.972,116.398 105.086,116.398 105.219,116.265 105.219,115.951 105.219,115.594 105.353,115.461 105.467,115.461 105.6,115.594 105.6,115.951 105.6,116.265 105.734,116.398 105.848,116.398 105.981,116.265 105.981,115.951 105.981,115.594 106.115,115.461 106.229,115.461 106.362,115.594 106.362,115.951 106.362,116.265 106.496,116.398 106.61,116.398 106.743,116.265 106.743,115.951 106.743,115.594 106.877,115.461 106.991,115.461 107.124,115.594 107.124,115.818 107.258,115.951 107.315,115.951 122.199,115.951 130.942,107.208 P4.13@133.586,107.208
  Bottom Layer w0.127: P1.51@84.7,119.8 v1(86.377,119.8)
T15: P1.52 P4.14 | length 63.9
  Top Layer w0.127: v1(82.347,119.863) 82.405,119.804 85.679,119.804 86.174,119.309 89.576,119.309 93.722,115.164 109.271,115.164 109.328,115.164 109.461,115.297 109.461,115.53 109.595,115.664 109.709,115.664 109.842,115.53 109.842,115.164 109.842,114.797 109.976,114.664 110.09,114.664 110.223,114.797 110.223,115.164 110.223,115.53 110.357,115.664 110.471,115.664 110.604,115.53 110.604,115.164 110.604,114.797 110.738,114.664 110.852,114.664 110.985,114.797 110.985,115.164 110.985,115.53 111.119,115.664 111.233,115.664 111.366,115.53 111.366,115.164 111.366,114.797 111.5,114.664 111.614,114.664 111.747,114.797 111.747,115.164 111.747,115.53 111.881,115.664 111.995,115.664 112.128,115.53 112.128,115.297 112.262,115.164 117.221,115.164 122.428,115.164 130.883,106.708 P4.14@133.586,106.708
  Bottom Layer w0.127: P1.52@80.9,119.8 80.963,119.863 v1(82.347,119.863)
T16: P1.37 P3.17 | length 64.1
  Top Layer w0.127: v1(83.023,125.4) 83.079,125.455 86.574,125.455 86.922,125.108 89.555,125.108 90.406,124.257 96.393,124.257 99.085,124.257 99.2,124.142 99.2,123.879 99.314,123.764 99.466,123.764 99.581,123.879 99.581,124.257 99.581,124.516 99.695,124.63 99.847,124.63 99.962,124.516 99.962,124.257 99.962,123.879 100.076,123.764 100.228,123.764 100.343,123.879 100.343,124.257 100.343,124.516 100.457,124.63 100.609,124.63 100.724,124.516 100.724,124.257 100.724,123.879 100.838,123.764 100.99,123.764 101.105,123.879 101.105,124.257 101.105,124.516 101.219,124.63 101.371,124.63 101.486,124.516 101.486,124.257 101.486,123.879 101.6,123.764 101.752,123.764 101.867,123.879 101.867,124.257 101.867,124.516 101.981,124.63 102.133,124.63 102.248,124.516 102.248,124.257 102.248,123.879 102.362,123.764 102.514,123.764 102.629,123.879 102.629,124.257 102.629,124.516 102.743,124.63 102.895,124.63 103.01,124.516 103.01,124.257 103.01,123.879 103.124,123.764 103.276,123.764 103.391,123.879 103.391,124.257 103.391,124.516 103.505,124.63 103.657,124.63 103.772,124.516 103.772,124.257 103.772,123.879 103.886,123.764 104.038,123.764 104.153,123.879 104.153,124.257 104.153,124.516 104.267,124.63 104.419,124.63 104.534,124.516 104.534,124.257 104.534,123.879 104.648,123.764 104.8,123.764 104.915,123.879 104.915,124.142 105.029,124.257 105.105,124.257 131.987,124.257 133.004,125.274 P3.17@133.586,125.274
  Bottom Layer w0.127: v1(83.023,125.4) P1.37@84.7,125.4
T17: P1.11 P2.11 | length 64.1
  Top Layer w0.127: v1(86.377,135.8) 86.88,135.8 93.447,142.367 101.498,142.367 103.556,142.367 103.67,142.253 103.67,142.006 103.784,141.892 103.937,141.892 104.051,142.006 104.051,142.367 104.051,142.702 104.165,142.817 104.318,142.817 104.432,142.702 104.432,142.367 104.432,142.006 104.546,141.892 104.699,141.892 104.813,142.006 104.813,142.367 104.813,142.702 104.927,142.817 105.08,142.817 105.194,142.702 105.194,142.367 105.194,142.006 105.308,141.892 105.461,141.892 105.575,142.006 105.575,142.367 105.575,142.702 105.689,142.817 105.842,142.817 105.956,142.702 105.956,142.367 105.956,142.006 106.07,141.892 106.223,141.892 106.337,142.006 106.337,142.367 106.337,142.702 106.451,142.817 106.604,142.817 106.718,142.702 106.718,142.367 106.718,142.006 106.832,141.892 106.985,141.892 107.099,142.006 107.099,142.367 107.099,142.702 107.213,142.817 107.366,142.817 107.48,142.702 107.48,142.367 107.48,142.006 107.594,141.892 107.747,141.892 107.861,142.006 107.861,142.367 107.861,142.702 107.975,142.817 108.128,142.817 108.242,142.702 108.242,142.367 108.242,142.006 108.356,141.892 108.509,141.892 108.623,142.006 108.623,142.253 108.737,142.367 108.814,142.367 125.262,142.367 130.981,148.086 P2.11@133.586,148.086
  Bottom Layer w0.127: P1.11@84.7,135.8 v1(86.377,135.8)
T20: P1.9 P2.9 | length 63.7
  Top Layer w0.127: v1(83.023,136.6) 83.079,136.655 86.744,136.655 93.828,143.739 99.492,143.739 103.048,143.739 103.162,143.624 103.162,143.446 103.276,143.332 103.429,143.332 103.543,143.446 103.543,143.739 103.543,143.929 103.657,144.043 103.81,144.043 103.924,143.929 103.924,143.739 103.924,143.446 104.038,143.332 104.191,143.332 104.305,143.446 104.305,143.739 104.305,143.929 104.419,144.043 104.572,144.043 104.686,143.929 104.686,143.739 104.686,143.446 104.8,143.332 104.953,143.332 105.067,143.446 105.067,143.739 105.067,143.929 105.181,144.043 105.334,144.043 105.448,143.929 105.448,143.739 105.448,143.446 105.562,143.332 105.715,143.332 105.829,143.446 105.829,143.739 105.829,143.929 105.943,144.043 106.096,144.043 106.21,143.929 106.21,143.739 106.21,143.446 106.324,143.332 106.477,143.332 106.591,143.446 106.591,143.739 106.591,143.929 106.705,144.043 106.858,144.043 106.972,143.929 106.972,143.739 106.972,143.446 107.086,143.332 107.239,143.332 107.353,143.446 107.353,143.624 107.467,143.739 107.544,143.739 125.915,143.739 131.263,149.086 P2.9@133.586,149.086
  Bottom Layer w0.127: v1(83.023,136.6) P1.9@84.7,136.6
U12: P1.56 P4.18 | length 64
  Top Layer w0.127: v1(82.474,118.186) 85.697,118.186 86.174,117.709 89.74,117.709 95.765,111.684 109.753,111.684 109.811,111.684 109.944,111.817 109.944,112.05 110.077,112.184 110.192,112.184 110.325,112.05 110.325,111.684 110.325,111.317 110.458,111.184 110.573,111.184 110.706,111.317 110.706,111.684 110.706,112.05 110.839,112.184 110.954,112.184 111.087,112.05 111.087,111.684 111.087,111.317 111.22,111.184 111.335,111.184 111.468,111.317 111.468,111.684 111.468,112.05 111.601,112.184 111.716,112.184 111.849,112.05 111.849,111.684 111.849,111.317 111.982,111.184 112.097,111.184 112.23,111.317 112.23,111.684 112.23,112.05 112.363,112.184 112.478,112.184 112.611,112.05 112.611,111.817 112.744,111.684 117.627,111.684 123.571,111.684 130.547,104.708 P4.18@133.586,104.708
  Bottom Layer w0.127: P1.56@80.9,118.2 80.914,118.186 v1(82.474,118.186)